# EAGLE board slang-lsm6dsl-prstenicek (EAGLE 9.1.3)
Positions: 96 mm, 75 mm, 39 mm
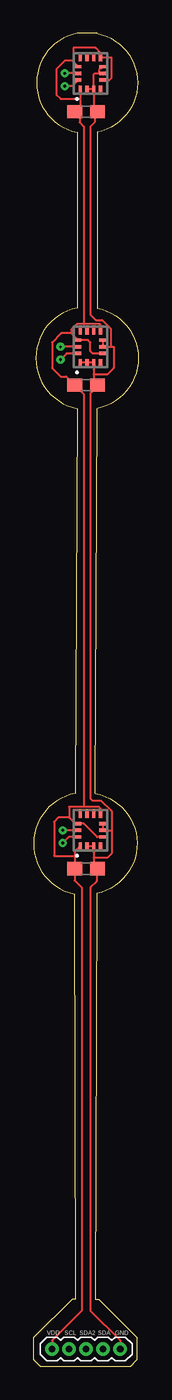
[diagram p0: board, top side]
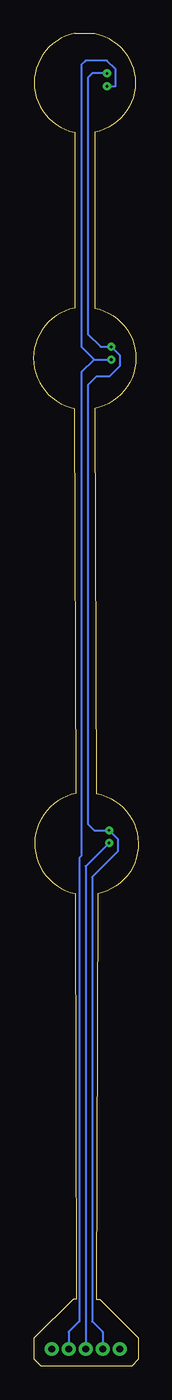
[diagram p1: board, bottom side, seen from below]

Size 7.82 x 99.5 mm. Coordinates in mm from the lower left corner, seen from the top.
Outline: 7.25,0 0.5,0 0,0.5 0,2.12 2.88,5 3.12,5 3.02,35.25 arc-157 3.12,42.75 3.25,71.5 arc-157 3.25,79 3.25,92.12 arc-157 3.25,99.5 4.75,99.5 arc-157 4.75,92.12 4.75,87.88 4.75,79 arc-157 4.75,71.5 4.62,42.75 arc-157 4.72,35.28 4.62,5 4.88,5 7.75,2.12 7.75,0.5 7.25,0
Outline: 7.25,0 7.28,0
Copper layers (1*16): Top 0.035mm / dielectric 1.5mm / Bottom 0.035mm
Design rules "default *": minimum track width 6mil, minimum drill 0.35mm, track to track 6mil, track to pad 6mil, pad to pad 6mil, via to via 6mil, smd to smd 3mil, copper to edge 6mil, drill to drill 6mil, minimum pad ring 10mil, minimum via ring 8mil, stop-mask expansion 4mil, vias tented up to drill 0mil, thermal gap 10mil

## Footprints (pad centres in the part's own frame; a part is rotated, then mirrored left to right if it is on the bottom)
LGA-14(2.5X3X0.86) = smd 0.475 x 0.25: 1 -1.163,0.75; 2 -1.163,0.25; 3 -1.163,-0.25; 4 -1.163,-0.75; 8 1.163,-0.75; 9 1.163,-0.25; 10 1.163,0.25; 11 1.163,0.75 | smd 0.25 x 0.475: 5 -0.5,-0.912; 6 0,-0.912; 7 0.5,-0.912; 12 0.5,0.912; 13 0,0.912; 14 -0.5,0.912
C0603 = smd 1.1 x 1: 1 -0.85,0; 2 0.85,0
1X05_1.27MM = drill 0.508 pad 1: 1 0,0; 2 1.27,0; 3 2.54,0; 4 3.81,0; 5 5.08,0

## Placement (x,y rotation side)
AC1  LSM6DSLTR  [LGA-14(2.5X3X0.86)]  4.24,96.52 90 top
AC2  LSM6DSLTR  [LGA-14(2.5X3X0.86)]  4.24,76.11 90 top
AC3  LSM6DSLTR  [LGA-14(2.5X3X0.86)]  4.24,40 90 top
C1  100n/16V  [C0603]  3.92,93.66 180 top
C2  100n/16V  [C0603]  3.92,73.25 180 top
C3  100n/16V  [C0603]  3.92,37.15 180 top
J1  [1X05_1.27MM]  1.39,1.27 0 top

## Library data of the parts
AC1-AC3 = LSM6DSLTR; ARROW_PART_NUMBER: LSM6DSLTR; ARROW_PRICE-STOCK: https://www.arrow.com/en/products/lsm6dsltr/stmicroelectronics; DESCRIPTION: IMUs - Inertial Measurement Units iNEMO inertial module: 3D accelerometer and 3D gyroscope; HEIGHT: mm; MANUFACTURER_NAME: STMicroelectronics; MANUFACTURER_PART_NUMBER: LSM6DSLTR; RS_PART_NUMBER: 1639811P; RS_PRICE-STOCK: http://uk.rs-online.com/web/p/products/1639811P
C1-C3 = resistor
J1 = SparkFun-Connectors

## Nets
GND: AC1.2 AC1.3 AC1.6 AC1.7 AC2.1 AC2.2 AC2.3 AC2.6 AC2.7 AC3.2 AC3.3 AC3.6 AC3.7 C1.1 C2.1 C3.1 J1.5
SCL: AC1.13 AC2.13 AC3.13 J1.2
SDA: AC1.14 AC2.14 J1.4
SDA2: AC3.14 J1.3
VDD: AC1.1 AC1.5 AC1.8 AC1.12 AC2.5 AC2.8 AC2.12 AC3.1 AC3.5 AC3.8 AC3.12 C1.2 C2.2 C3.2 J1.1

## Tracks (layer width: path | path; a pad name or v marks a point on that pad's centre or on a via)
GND
  Top 0.152: AC1.2 AC1.3 | AC1.3 4.49,93.94 C1.1 4.78,93.4 4.56,93.19 4.56,92.87 4.24,92.55 4.24,78.51 4.65,78.1 5.12,78.1 5.75,77.47 5.75,76.11 | AC1.3 4.49,96.45 4.56,96.52 4.88,96.52 | 4.88,96.52 AC1.6 | AC1.7 4.88,96.74 4.88,96.52 | AC2.1 AC2.2 AC2.3 4.49,74.04 | 4.49,74.04 4.49,73.53 C2.1 4.78,73.14 4.24,72.61 4.24,42.38 4.4,42.23 5.04,42.23 5.83,41.43 5.83,40 | AC2.7 AC2.6 5.75,76.11 | 5.75,76.11 5.99,76.11 5.99,74.52 5.51,74.04 4.49,74.04 | AC3.2 AC3.3 4.49,37.94 | 4.49,37.94 4.49,37.43 C3.1 4.72,37.09 4.72,36.19 4.24,35.72 4.24,4.13 6.46,1.91 J1.5 | AC3.7 AC3.6 5.83,40 | 5.83,40 5.83,38.26 5.51,37.94 4.49,37.94
SCL  (via drill 0.2)
  Top 0.152: AC1.13 v2.34,96.52 | AC2.13 v2.02,76.11 | AC3.13 v2.18,40
  Bottom 0.152: v2.34,96.52 3.45,96.52 3.77,96.2 3.77,77.06 2.81,76.11 v2.02,76.11 1.39,75.47 1.39,74.68 2.18,73.88 3.13,73.88 3.77,73.25 3.77,40.48 3.29,40 v2.18,40 1.54,39.37 1.54,38.42 3.45,36.51 3.45,3.33 2.66,2.54 J1.2
SDA  (via drill 0.2)
  Top 0.152: AC1.14 2.88,95.57 v2.34,95.57 | AC2.14 2.47,75.61 v2.02,75.15
  Bottom 0.152: v2.34,95.57 1.7,95.57 1.7,96.84 2.34,97.47 3.92,97.47 4.24,97.16 4.24,76.11 3.29,75.15 | 3.29,75.15 v2.02,75.15 | 3.29,75.15 4.24,74.2 4.24,38.1 4.4,37.94 4.4,3.33 5.2,2.54 J1.4
SDA2  (via drill 0.2)
  Top 0.152: AC3.14 2.63,39.5 v2.18,39.05
  Bottom 0.152: v2.18,39.05 3.92,37.3 J1.3
VDD
  Top 0.152: AC1.1 3.49,94.61 | 3.49,94.61 3.49,94.08 C1.2 3.45,93.29 3.45,92.87 3.77,92.55 3.77,77.79 | AC1.5 5.65,96.02 5.83,96.2 5.83,97.69 AC1.8 4.99,98.07 4.64,98.42 2.97,98.42 2.97,97.47 | 2.97,97.47 2.97,97.38 AC1.12 | 2.97,97.47 2.34,97.47 1.7,96.84 1.7,94.93 2.02,94.61 3.49,94.61 | AC2.5 4.42,75.61 4.24,75.79 4.24,76.42 4.06,76.61 AC2.12 2.81,77.12 | AC2.8 4.99,77.79 3.77,77.79 | 3.77,77.79 3.23,77.79 2.81,77.38 2.81,77.12 | 2.81,77.12 2.08,77.12 1.39,76.42 1.39,74.52 2.02,73.88 2.44,73.88 C2.2 3.77,72.56 3.77,41.75 | AC3.1 3.08,38.42 3.08,38.1 | 3.08,38.1 C3.2 3.08,36.25 3.61,35.72 3.61,4.13 1.39,1.91 J1.1 | AC3.5 4.74,39.5 3.74,40.5 3.45,40.5 | 3.45,40.5 AC3.12 | AC3.8 4.99,41.63 4.88,41.75 3.77,41.75 | 3.77,41.75 2.66,41.75 2.66,40.96 | 3.45,40.5 3.11,40.5 2.66,40.96 | 2.66,40.96 1.86,40.96 1.54,40.64 1.54,38.1 3.08,38.1

## Text on the board
tNames: VDD | SCL | SDA2 | SDA | GND